# Altium PCB MAGI'sBuckPower-TEST.PcbDoc
Units mil, origin at the board's own origin, x right, y up, seen from the top; angles counter-clockwise.
Board outline 11520 x 6780 mil, 2 copper layers (Top Layer, Bottom Layer); 28 components, 16 nets, 102 pads, 88 vias.
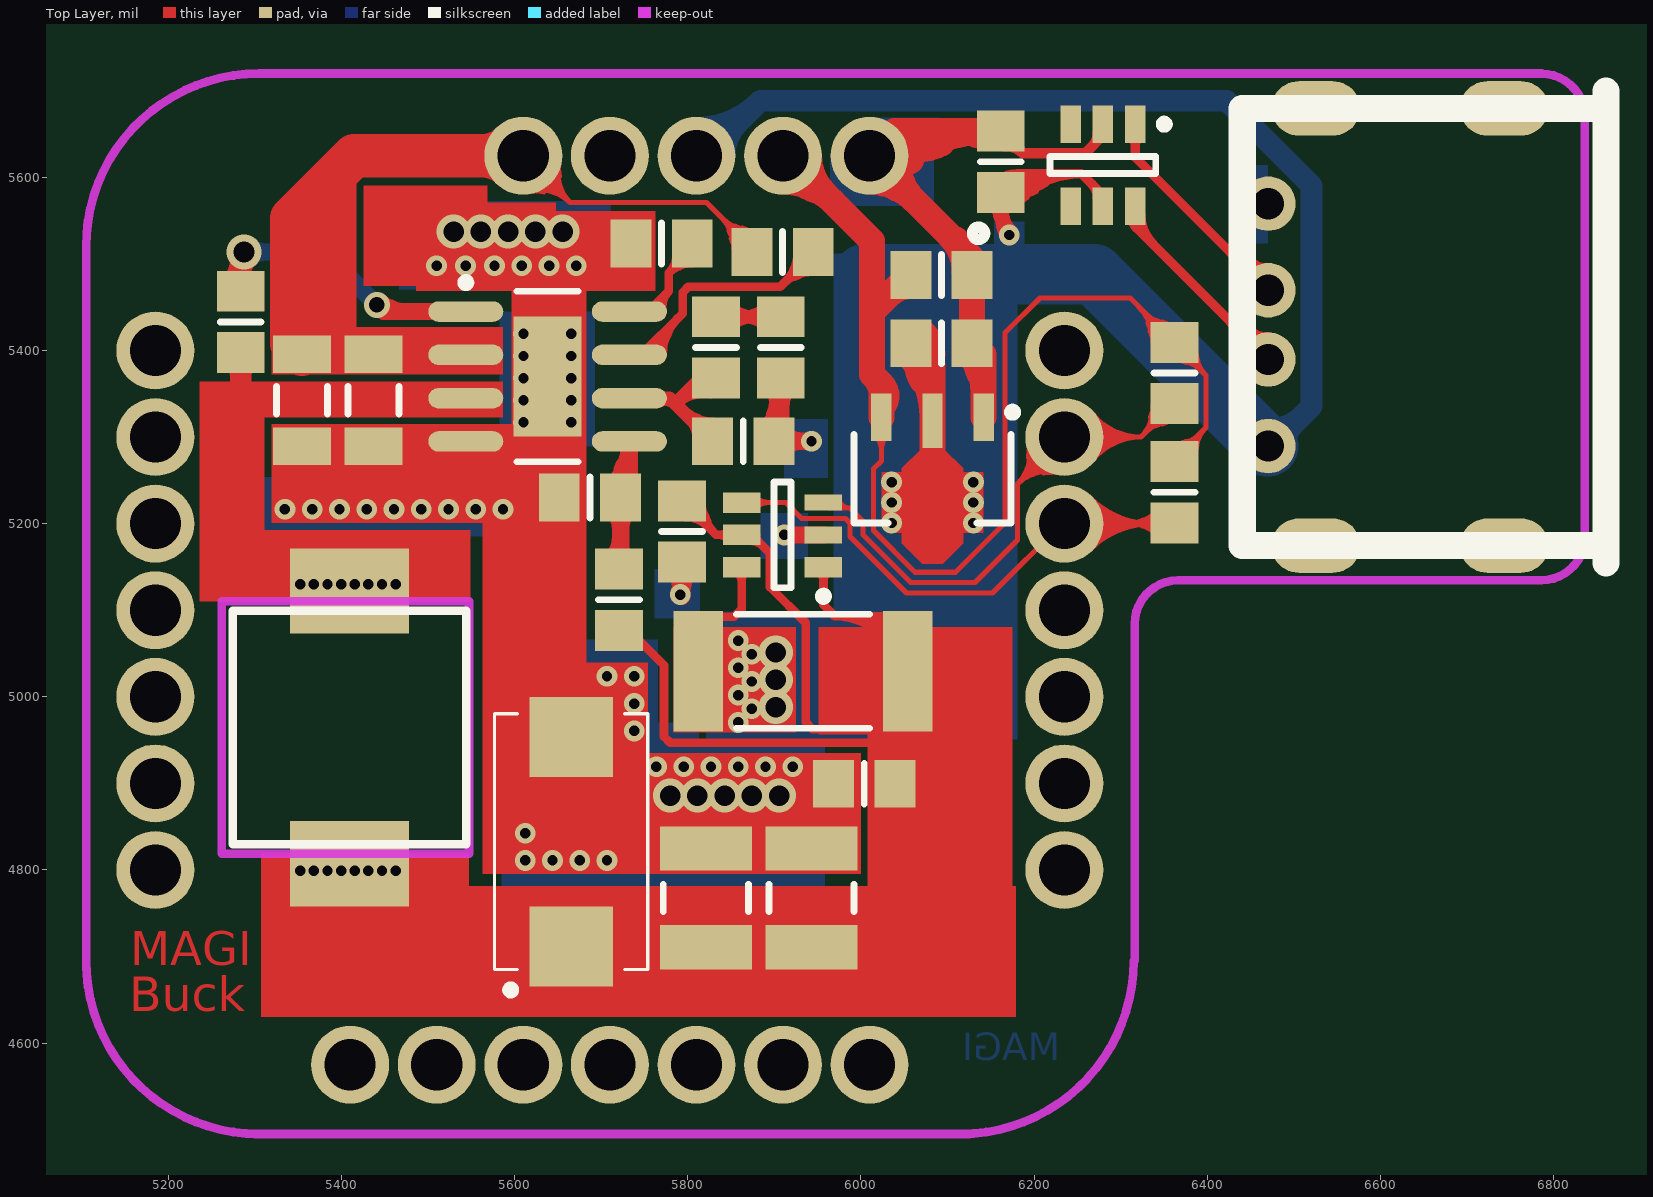
[diagram p0: Top Layer view]
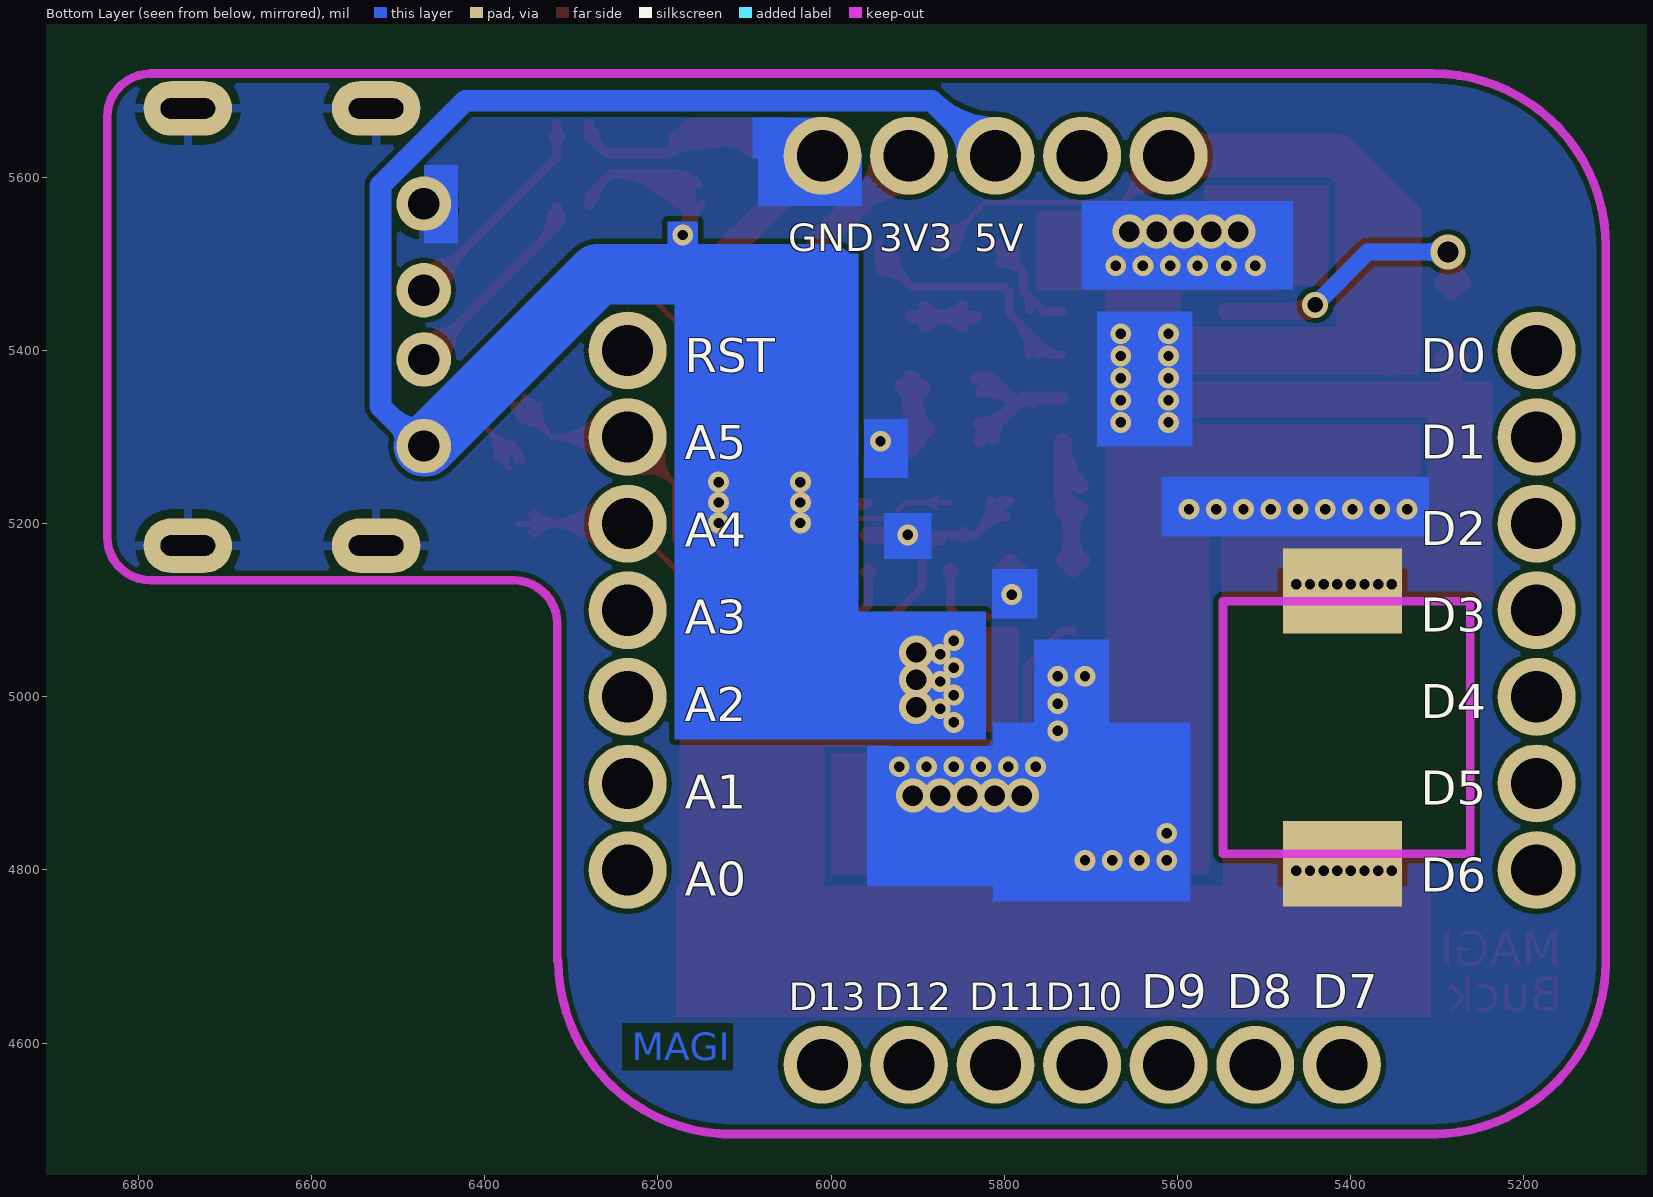
[diagram p1: Bottom Layer view, seen from below]

## Layer stack, top to bottom
Top Solder: solder mask 0.4, Solder Resist, Dk 3.5
Top Layer: signal copper 1.4
Dielectric1: dielectric 12.6, FR-4, Dk 4.8
Bottom Layer: signal copper 1.4
Bottom Solder: solder mask 0.4, Solder Resist, Dk 3.5

## Board outline
455,7180 460,7185 11965,7185 11965,415 11975,405 485,405

## Design rules (kind name [scope] priority, off if disabled: settings)
Clearance [All] p1: gap=6
ComponentClearance [InNet('No Net') vs InNet('No Net')] p1: gap=10 collisioncheckmode=3 verticalgap=0 showdistances=FALSE
HoleSize [All] p1: absolutevalues=TRUE maxlimit=118.11 minlimit=1.18 maxpercent=80.000 minpercent=20.000
PolygonConnect [All] p1: connectstyle=Relief reliefconductorwidth=10 reliefentries=4 polygonreliefangle="90 Angle" airgapwidth=10
RoutingVias [All] p1: holewidth=27.56 width=15.75 viastyle="Through Hole" minholewidth=12 minwidth=24 maxholewidth=100 maxwidth=150
SolderMaskExpansion [All] p1: expansion=4
Width [All] p1: maxlimit=1000 minlimit=6 preferedwidth=10
27 further rules are at their usual default settings.

## Classes and differential pairs
component class MAGI'sBuckPower-TEST: C11 C28 C29 C30 C31 C32 C33 C34 C35 C36 C37 C39 J2 J3 L2 R22 R23 R24 R25 R26 R27 R28 U3 U4 U7 U8

## Components (designator, comment, footprint, x,y, rotation, side; value= is the part's Value field where it differs from the comment)
C1 "10uf" C1210_N 5820.87,4767.72 r90 top
C2 "10uf" C1210_N 5942.91,4767.72 r90 top
C11 "10uf" 6-0805_N 6093.09,5408.41 r0 top
C28 "10nf" 6-0805_N 5283.46,5433.07 r90 top
C29 "0.1uf" 6-0805_N 5769.69,5523.62 r0 top
C30 "3.9nf" 6-0805_N 5832.68,5403.54 r90 top
C31 "CAP_1" C1206 5354.33,5342.52 r270 top
C32 "3.9nf" 6-0805_N 5864.17,5295.28 r0 top
C33 "10uf" 6-0805_N 6161.42,5618.11 r90 top
C34 "CAP_1" 6TPE330M 5665.35,4832.68 r90 top
C35 "0805" 6-0805_N 6003.94,4899.61 r180 top
C36 "10uf" 6-0805_N 6093.09,5487.15 r0 top
C37 "0805" 6-0805_N 5793.31,5190.94 r270 top
C39 "CAP_1" C1206 5437.01,5342.52 r270 top
J2 "USB1" USB-04A 6498.03,5427.17 r90 top
J3 "MAGI-M8" MAGIsBoard 5710,5100 r0 top
L2 "Inductor" 7*7 5419.29,4964.57 r270 top
R1 "5K" 6-0805_N 6362.2,5374.02 r90 top
R2 "5K" 6-0805_N 6362.2,5236.22 r90 top
R22 "RES1_1" 2512 5933.07,5029.53 r180 top
R25 "6.8K" 6-0805_N 5907.48,5403.54 r270 top
R26 "5K" 6-0805_N 5720.47,5112.2 r270 top
R27 "5K" 6-0805_N 5687.01,5230.31 r180 top
R28 "5K" 6-0805_N 5909.45,5513.78 r180 top
U3 "TPS2513" TPS2513 6279.53,5614.17 r270 top
U4 "MCP3421" tps2513 5909.45,5187.01 r180 top
U7 "HS7333" HS7333 6082.68,5251.97 r270 top
U8 "MP2307DN" MP2307DN 5638.03,5370 r0 top

## Footprints (in the part's own frame and the unit in brackets; to place one, negate y for a bottom-side part, rotate by r counter-clockwise, add the part's x,y. Pads: shape width x height; smd on the part's side, far side on the other; paste and mask are expansions set on the pad)
6-0805_N [mm] "Chip Resistor, Body 2.0x1.2mm, IPC Medium Density"
  rect 1.2x1.4 smd: 1(-0.9,0) 2(0.9,0)
  silkscreen extent 0,-0.6 0,0.6, body extent -1.07,-0.7 1.07,0.7, height 0.7
6TPE330M [mm] "Molded Capacitor, 2-Leads, Body 7.30x4.30mm, IPC Medium Density"
  rect 2.35x2.45 smd: 1(-3.075,0) 2(3.075,0)
  silkscreen extent -4.47,-2.25 3.75,2.25, body extent -3.75,-2.25 3.75,2.25, height 2
7*7 [mil]
  rect 98.43x137.8 all layers, no hole: 1(-157.5,-10) 2(157.5,-10)
  silkscreen extent -135,-145 135,125
2512 [mm]
  rect 1.45x3.55 smd: 1(-3.075,0) 2(3.075,0)
  silkscreen extent -1.95,-1.68 1.95,1.68, body extent -3.22,-1.7 3.22,1.7, height 0.65
C1206 [mm] "Chip Capacitor, Body 3.2x1.6mm, IPC High Density"
  rect 1.1x1.7 smd: 1(-1.35,0) 2(1.35,0)
  silkscreen extent -0.4,-0.75 0.4,0.75, body extent -1.7,-0.9 1.7,0.9, height 1.3
C1210_N [mm] "Chip Capacitor, Body 3.2x2.5mm, IPC Medium Density"
  rect 1.3x2.7 smd: 1(-1.45,0) 2(1.45,0)
  silkscreen extent -0.4,-1.25 0.4,1.25, body extent -1.7,-1.35 1.7,1.35, height 1.5
HS7333 [mm] "SOT89, 3-Leads, Body 4.50x2.50mm, Pitch 1.50mm, Lead Span 4.1mm, IPC Medium Density"
  rect 1.4x0.6 smd: 1(-1.8,1.5) 3(-1.8,-1.5)
  rect 1.6x0.6 smd: 2(-1.7,0)
  Top Layer region: -0.9,0.3 -0.3,0.9 1.9,0.9 2.5,0.3 2.5,-0.3 1.9,-0.9 -0.3,-0.9 -0.9,-0.3
  silkscreen extent -2.07,-2.3 1.3,2.48, body extent -1.3,-2.3 1.3,2.3, height 1.6
MAGIsBoard [mil]
  round 90 hole 59.06: 1(300,525) 2(200,525) 3(100,525) 4(0,525) 5(-100,525) 8(-525,300) 9(-525,200) 10(-525,100) 11(-525,0) 12(-525,-100) 13(-525,-200) 14(-525,-300) 15(-300,-525) 16(-200,-525) 17(-100,-525) 18(0,-525) 19(100,-525) 20(200,-525) 21(300,-525) 22(525,-300) 23(525,-200) 24(525,-100) 25(525,0) 26(525,100) 27(525,200) 28(525,300)
  Keep-Out Layer lines w10: -605,-415 -605,290 -605,420 cw(c-405,420) -405,620 ; -605,-405 ccw(c-405,-405) -405,-605 ; -410,-605 415,-605 ; 405,-605 ccw(c405,-405) 605,-405
  silkscreen extent 419,428 433,442
MP2307DN [mm] "SOIC, 8-Leads, Body 4.90x3.90mm, Pitch 1.27mm, Thermal Pad 3.51.2x2.00.2mm, IPC Medium Density"
  oval 2.2x0.6 smd: 1(-2.4,1.905) 2(-2.4,0.635) 3(-2.4,-0.635) 4(-2.4,-1.905) 5(2.4,-1.905) 6(2.4,-0.635) 7(2.4,0.635) 8(2.4,1.905)
  rect 2x3.51 smd: 9(0,0)
  silkscreen extent -2.52,-2.5 0.9,2.88, body extent -2,-2.5 2,2.5, height 1.7
TPS2513 [mm]
  rect 1.1x0.6 smd: 1(-1.2,0.95) 2(-1.2,0) 3(-1.2,-0.95) 4(1.2,-0.95) 5(1.2,0) 6(1.2,0.95)
  silkscreen extent -1.32,-1.55 0.25,1.93, body extent -0.87,-1.52 0.87,1.53, height 1.45
tps2513 [mm]
  rect 1.1x0.6 smd: 1(-1.2,0.95) 4(1.2,-0.95) 5(1.2,0) 6(1.2,0.95)
  rect 1.1x0.508 smd: 2(-1.2,0)
  rect 1.1x0.457 smd: 3(-1.2,-0.95)
  silkscreen extent -1.33,-1.55 0.25,1.92, body extent -0.87,-1.52 0.87,1.53, height 1.45
USB-04A [mm]
  oval 1.6x2.6 hole 0.6 slot 1.6 at 90 deg: 0(-6.413,-0.699) 0(-6.413,-6.223) 0(6.413,-0.698) 0(6.414,-6.223)
  round 1.6 hole 0.92: 1(-3.492,0.698) 2(-0.953,0.698) 3(1.079,0.699) 4(3.619,0.699)
  silkscreen extent -6.92,-9.21 6.92,1.46

## Part data
C1 C2 C11 C33 C36: library part "CAPACITOR POL", "Capacitor"
C28 C29 C30 C32 C35 C37: library part CAP_1, "Capacitor"
C31 C34 C39: "Capacitor"
R1 R2 R25 R26 R27 R28: library part RES1

## Via types
v1: diameter 24, hole 12, Top Layer to Bottom Layer, 73 vias
v2: diameter 39.37, hole 23.62, Top Layer to Bottom Layer, 13 vias
v3: diameter 30, hole 18, Top Layer to Bottom Layer, 1 vias
v4: diameter 40, hole 24, Top Layer to Bottom Layer, 1 vias

## Nets (pads, with @x,y where several pads share a name; then routed paths per layer and width w, separated by ;. In a path a pad name is that pad's centre, name@x,y a point inside that pad or via, vN(x,y) a via of type N, cw(c..) or ccw(c..) an arc to the next point about the centre after c; other vN are vias at no path point)
3.3V: C36.1 J3.2 R1.2 R2.2 U7.3 | length 3159
  Top Layer w6: U7.3 6023.62,5272.57 6014.43,5263.38 6014.43,5192.09 6062.63,5143.89 6109.37,5143.89 6166.51,5201.02 6166.51,5420.45 6206.69,5460.63 6311.02,5460.63 R1.2 6362.2,5407.76 6398.76,5371.2 ; 6331.58,5432.09 ccw(c6367.01,5441.58) R1.2@6357.38,5406.19 ; 6334.28,5422.01 ccw(c6363.84,5429.93) R1.2@6355.81,5400.4 ; 6339.51,5435.1 cw(c6331.69,5405.95) R1.2@6361.62,5409.89 ; R1.2@6348.18,5432.77 cw(c6341.33,5407.22) R1.2@6367.57,5410.67 ; R2.2@6356.79,5272.32 cw(c6381.76,5270.54) R2.2@6375.28,5294.72 ; R1.2@6356.81,5408.53 ccw(c6382.34,5411.05) R1.2@6375.7,5386.27 ; R2.2 6362.2,5274.67 6398.76,5311.23 ; R2.2@6362.77,5271.89 cw(c6390.65,5269.91) 6383.42,5296.9 ; R1.2@6362.78,5409.12 ccw(c6391.56,5411.95) 6384.07,5384.02 ; R1.2@6371.82,5416.91 cw(c6344.34,5380.82) R1.2@6389.29,5386.9 ; R2.2@6371.94,5264.28 ccw(c6343.91,5299.95) R2.2@6388.95,5294.55 ; 6023.62,5285.81 cw(c6044.89,5285.81) 6029.85,5300.86 ccw(c6044.89,5285.81) 6023.62,5285.81 ; 6023.62,5285.81 ccw(c6002.35,5285.81) 6017.39,5300.86 cw(c6002.35,5285.81) 6023.62,5285.81 ; 6398.76,5311.23 ccw(c6429.29,5280.71) 6386.55,5274.58 cw(c6429.29,5280.71) 6398.76,5311.23 ; 6398.76,5311.23 6398.76,5371.2 ; 6398.76,5371.21 cw(c6428.97,5401.41) 6386.6,5406.83 ccw(c6428.97,5401.41) 6398.76,5371.21 ; 6320.28,5451.37 cw(c6278.35,5409.45) 6337.65,5409.45 ccw(c6278.35,5409.45) 6320.28,5451.37 ; 6329.78,5441.87 ccw(c6358.27,5470.35) 6358.27,5430.07 cw(c6358.27,5470.35) 6329.78,5441.87 ; 6330.52,5441.13 cw(c6298.84,5409.45) 6343.65,5409.45 ccw(c6298.84,5409.45) 6330.52,5441.13 ; R1.2@6340.03,5431.63 ccw(c6358.27,5449.87) 6358.27,5424.07 cw(c6358.27,5449.87) R1.2@6340.03,5431.63 ; R1.2@6340.77,5430.89 cw(c6319.33,5409.45) 6349.65,5409.45 ccw(c6319.33,5409.45) R1.2@6340.77,5430.89 ; R2.2@6366.14,5286.28 ccw(c6366.14,5304.78) 6379.23,5291.7 cw(c6366.14,5304.78) R2.2@6366.14,5286.28 ; R2.2@6366.14,5292.28 ccw(c6366.14,5325.27) 6389.47,5301.94 cw(c6366.14,5325.27) R2.2@6366.14,5292.28 ; R1.2@6366.14,5388.83 cw(c6366.14,5352.61) 6391.75,5378.22 ccw(c6366.14,5352.61) R1.2@6366.14,5388.83 ; R1.2@6366.14,5394.83 cw(c6366.14,5373.1) 6381.51,5388.46 ccw(c6366.14,5373.1) R1.2@6366.14,5394.83 ; R2.2@6374.68,5272.88 cw(c6399.62,5276.45) 6381.8,5294.27 ccw(c6399.62,5276.45) R2.2@6374.68,5272.88 ; R1.2@6374.69,5408.35 ccw(c6398.32,5405.33) 6381.48,5388.49 cw(c6398.32,5405.33) R1.2@6374.69,5408.35 ; R2.2@6380.62,5273.73 cw(c6414.45,5278.58) 6390.28,5302.75 ccw(c6414.45,5278.58) R2.2@6380.62,5273.73 ; R1.2@6380.65,5407.59 ccw(c6413.64,5403.37) 6390.12,5379.85 cw(c6413.64,5403.37) R1.2@6380.65,5407.59
  Top Layer w30: 5949.41,5589.9 ccw(c5902.99,5577.46) J3.2 ; 5950.49,5584.15 cw(c5965.26,5639.28) J3.2 ; U7.3 6023.62,5361.57 ; C36.1 6055.52,5487.15 6013.04,5444.67 ; J3.2 5914.54,5625 6013.04,5526.51 6013.04,5444.67 ; 6013.04,5372.15 cw(c5979.78,5338.9) 6026.81,5338.56 ccw(c5979.78,5338.9) 6013.04,5372.15 ; 6013.04,5372.16 6023.62,5361.57 ; 6013.04,5372.16 6013.04,5444.67 ; 6023.62,5361.57 cw(c6009.6,5347.55) 6026.31,5336.87 ccw(c6009.6,5347.55) 6023.62,5361.57 ; J3.2@5910,5595 cw(c5910,5511.61) 5968.96,5570.58 ccw(c5910,5511.61) J3.2@5910,5595 ; J3.2@5940,5625 ccw(c6001.46,5625) 5958,5581.54 cw(c6001.46,5625) J3.2@5940,5625 ; 6032.57,5464.2 cw(c6057.66,5439.11) 6057.66,5474.59 ccw(c6057.66,5439.11) 6032.57,5464.2
5SW: C28.1 L2.1 U8.3 | length 100.1
  Top Layer w25: C28.1@5275.6,5389.77 cw(c5256.61,5370.79) 5283.46,5370.79 cw(c5310.32,5370.79) C28.1@5291.33,5389.77 ; C28.1 5283.46,5342.52 5285.43,5340.55
  other v1: 5352.36,5129.92 5368.11,5129.92 5383.86,5129.92 5399.61,5129.92 5415.35,5129.92 5431.1,5129.92 5446.85,5129.92 5462.6,5129.92
5V: C11.1 C33.1 J2.1 J3.3 R22.2 U3.5 U4.6 U7.2 | length 4011.2
  Top Layer w10: R22.2@5818.9,5092.52 5853.35,5092.52 5862.2,5101.38 U4.6 ; 5862.2,5133.16 cw(c5878.65,5133.16) 5867.02,5144.79 ccw(c5878.65,5133.16) 5862.2,5133.16 ; 5862.2,5133.16 ccw(c5845.76,5133.16) 5857.39,5144.79 cw(c5845.76,5133.16) 5862.2,5133.16
  Top Layer w11: C11.1 C11.1@6057.66,5412.97 ; 6160.07,5553.53 cw(c6146.63,5540.09) v1@6164.98,5535.15 ; 6160.82,5547.28 cw(c6155.53,5538.7) v1@6165.09,5535.52 ; C33.1@6162.73,5579.82 ccw(c6177.28,5595.64) 6189.52,5577.97 ; 6164.91,5557.02 cw(c6146.17,5546.2) v1@6165.46,5536.41 ; C33.1@6170.18,5587.92 ccw(c6186.83,5606.02) 6200.83,5585.8 ; v1@6173.23,5531.5 v1(6171.26,5533.46) 6161.42,5543.31 ; C33.1@6174.68,5598.22 ccw(c6188.21,5620.75) 6202.57,5598.74 ; C33.1@6177.62,5596.01 ccw(c6196.37,5616.39) 6212.13,5593.63 ; C33.1@6183.09,5578.95 cw(c6202.92,5574.77) 6191.85,5591.74 ; U3.5 6279.53,5579.26 6254.45,5604.33 ; C33.1@6156.13,5563.05 ccw(c6194.24,5573.26) v1@6174.51,5539.09 ; C33.1@6156.13,5563.05 ccw(c6194.24,5573.26) v1@6174.51,5539.09 ; C33.1@6156.13,5563.05 ccw(c6194.24,5573.26) v1@6174.51,5539.09 ; 6158.3,5554.95 ccw(c6179.38,5560.6) v1@6173.12,5539.69 ; 6158.3,5554.95 ccw(c6179.38,5560.6) v1@6173.12,5539.69 ; 6158.3,5554.95 ccw(c6179.38,5560.6) v1@6173.12,5539.69 ; 6161.42,5543.31 cw(c6153.18,5535.07) 6164.79,5534.04 ccw(c6153.18,5535.07) 6161.42,5543.31 ; 6161.42,5543.31 ccw(c6169.66,5551.55) 6170.69,5539.94 cw(c6169.66,5551.55) 6161.42,5543.31 ; 6161.42,5543.31 cw(c6195.12,5543.31) 6173.2,5568.91 ccw(c6195.12,5543.31) 6161.42,5543.31 ; 6161.42,5543.31 ccw(c6127.72,5543.31) 6149.63,5568.91 cw(c6127.72,5543.31) 6161.42,5543.31 ; 6161.42,5543.31 C33.1 6183.07,5604.33 6254.45,5604.33 ; 6254.45,5604.33 ccw(c6254.45,5502.78) 6178.85,5570.58 cw(c6254.45,5502.78) 6254.45,5604.33 ; C33.1@6154.28,5592.61 cw(c6180.53,5569.07) 6180.53,5604.33 ccw(c6180.53,5569.07) C33.1@6154.28,5592.61 ; 6161.42,5546.36 ccw(c6184.16,5546.36) 6168.08,5530.28 cw(c6184.16,5546.36) 6161.42,5546.36 ; C33.1@6161.42,5572.92 ccw(c6210.71,5572.92) 6175.86,5538.06 cw(c6210.71,5572.92) C33.1@6161.42,5572.92 ; C33.1@6162.47,5585.27 cw(c6205.17,5546.97) 6205.17,5604.33 ccw(c6205.17,5546.97) C33.1@6162.47,5585.27 ; C33.1@6170.66,5577.92 cw(c6229.81,5524.88) 6229.81,5604.33 ccw(c6229.81,5524.88) C33.1@6170.66,5577.92 ; 6267,5591.79 cw(c6251.98,5576.77) 6273.22,5576.77 ccw(c6251.98,5576.77) 6267,5591.79
  Top Layer w30: C11.1 6082.68,5383.39 6082.68,5251.97 ; C11.1@6065.99,5402.24 ccw(c6113.56,5389.5) 6070.91,5364.87 ; C11.1@6051.56,5398.38 cw(c5976.44,5323.26) 6082.68,5323.26 ccw(c5976.44,5323.26) C11.1@6051.56,5398.38 ; C11.1@6057.66,5395.85 cw(c6057.66,5365.53) 6079.1,5386.97 ccw(c6057.66,5365.53) C11.1@6057.66,5395.85 ; C11.1@6072.77,5419.59 cw(c6048.87,5395.68) 6082.68,5395.68 ccw(c6048.87,5395.68) C11.1@6072.77,5419.59
  Bottom Layer w25: J3.3 5820.2,5625 5883.7,5688.5 6422.4,5688.5 6520.53,5590.37 6520.53,5335.49 J2.1@6470.47,5285.43 ; 6082.68,5472.44 6082.68,5488.19 ; J3.3@5810,5657.5 ccw(c5810,5760.58) 5882.89,5687.69 cw(c5810,5760.58) J3.3@5810,5657.5 ; J3.3@5842.5,5625 cw(c5896.34,5625) 5858.27,5663.07 ccw(c5896.34,5625) J3.3@5842.5,5625 ; J2.1@6470.53,5308.66 ccw(c6470.53,5364.6) 6510.08,5325.04 cw(c6470.53,5364.6) J2.1@6470.53,5308.66 ; J2.1@6489.53,5289.67 cw(c6525.31,5289.67) 6500.01,5314.97 ccw(c6525.31,5289.67) J2.1@6489.53,5289.67
  Bottom Layer w70: 6003.94,5488.19 6082.68,5488.19 6269.48,5488.19 6468.01,5289.67 J2.1
  other v1: 5858.27,4970.47 5874.02,4986.22 5858.27,5001.97 5874.02,5017.72 5858.27,5033.46 5874.02,5049.21 5858.27,5064.96 6035.43,5200.79 6129.92,5200.79 6035.43,5224.41 6129.92,5224.41 6035.43,5248.03 6129.92,5248.03
  other v2: 5901.57,4988.19 5901.57,5019.69 5901.57,5051.18
DM1: J2.2 U3.6 | length 820.1
  Top Layer w11: U3.6@6313.77,5551.62 cw(c6295.75,5520.4) 6330.57,5529.73 ; U3.6 6316.93,5543.27 ; 6438.69,5411.47 ccw(c6477.1,5421.76) J2.2@6469.13,5382.8 ; 6448.73,5421.5 cw(c6438.44,5383.09) J2.2@6477.39,5391.07 ; J2.2 6316.93,5543.27 ; 6316.93,5543.27 cw(c6328.9,5543.27) 6321.06,5552.32 ccw(c6328.9,5543.27) 6316.93,5543.27 ; 6316.93,5543.27 ccw(c6304.96,5543.27) 6312.8,5552.32 cw(c6304.96,5543.27) 6316.93,5543.27 ; 6426.15,5434.04 cw(c6381.78,5389.67) 6444.54,5389.67 ccw(c6381.78,5389.67) 6426.15,5434.04 ; 6426.15,5434.04 ccw(c6470.53,5478.42) 6470.53,5415.66 cw(c6470.53,5478.42) 6426.15,5434.04 ; 6444.93,5415.27 cw(c6419.33,5389.67) 6455.54,5389.67 ccw(c6419.33,5389.67) 6444.93,5415.27 ; 6444.93,5415.27 ccw(c6470.53,5440.86) 6470.53,5404.66 cw(c6470.53,5440.86) 6444.93,5415.27 ; U3.6@6312.24,5557.09 ccw(c6334.28,5557.09) 6318.7,5541.5 cw(c6334.28,5557.09) U3.6@6312.24,5557.09 ; U3.6@6323.24,5557.09 ccw(c6371.84,5557.09) 6337.47,5522.72 cw(c6371.84,5557.09) U3.6@6323.24,5557.09
DP1: J2.3 U3.1 | length 702.2
  Top Layer w11: U3.1 6316.93,5623.27 J2.3 ; 6438.69,5491.47 ccw(c6477.1,5501.76) J2.3@6469.13,5462.8 ; 6448.73,5501.5 cw(c6438.44,5463.09) J2.3@6477.39,5471.07 ; 6316.93,5636.34 cw(c6332.17,5636.34) 6321.39,5647.11 ccw(c6332.17,5636.34) 6316.93,5636.34 ; 6316.93,5636.34 ccw(c6301.69,5636.34) 6312.47,5647.11 cw(c6301.69,5636.34) 6316.93,5636.34 ; 6426.15,5514.04 cw(c6381.78,5469.67) 6444.54,5469.67 ccw(c6381.78,5469.67) 6426.15,5514.04 ; 6426.15,5514.04 ccw(c6470.53,5558.42) 6470.53,5495.66 cw(c6470.53,5558.42) 6426.15,5514.04 ; 6444.93,5495.27 cw(c6419.33,5469.67) 6455.54,5469.67 ccw(c6419.33,5469.67) 6444.93,5495.27 ; 6444.93,5495.27 ccw(c6470.53,5520.86) 6470.53,5484.66 cw(c6470.53,5520.86) 6444.93,5495.27
GND: C1.2 C2.2 C11.2 C29.1 C31.2 C32.2 C33.2 C34.2 C35.2 C36.2 C37.2 C39.2 J2.0 J2.4 J3.1 R25.2 R27.2 U3.2 U4.2 U7.1 U8.4 U8.9 | length 2753.2
  Top Layer w12: C33.2 6187.2,5627.76 ; U3.2 6279.53,5648.38 6258.91,5627.76 6187.2,5627.76 ; 6187.2,5627.76 cw(c6201.6,5642.16) 6182.17,5648.26 ccw(c6201.6,5642.16) 6187.2,5627.76 ; 6187.2,5627.77 ccw(c6167.39,5607.96) 6166.14,5635.94 cw(c6167.39,5607.96) 6187.2,5627.77 ; 6267.35,5636.21 ccw(c6251.98,5651.57) 6273.72,5651.57 cw(c6251.98,5651.57) 6267.35,5636.21
  Top Layer w20: v1(5791.34,5118.11) 5793.31,5116.14 C37.2 ; R25.2@5895.42,5357.18 cw(c5882.92,5340.37) 5903.15,5334.95 ; 5901.64,5329.06 ccw(c5913.12,5322.44) C32.2@5906.46,5310.99 ; R25.2 5907.48,5303.15 C32.2 v1(5942.91,5295.28) ; v1(5911.42,5187.01) U4.2 ; v1@5789.61,5119.11 ccw(c5776.35,5126.77) 5791.14,5130.73 ; v1@5789.61,5119.11 ccw(c5776.35,5126.77) 5791.14,5130.73 ; v1@5789.61,5119.11 ccw(c5776.35,5126.77) 5791.14,5130.73 ; v1@5793.31,5122.63 cw(c5826.19,5122.63) 5802.94,5145.88 ccw(c5826.19,5122.63) v1@5793.31,5122.63 ; v1@5793.31,5122.63 ccw(c5760.42,5122.63) 5783.67,5145.88 cw(c5760.42,5122.63) v1@5793.31,5122.63 ; 5907.48,5335.22 cw(c5940.37,5335.22) 5917.11,5358.48 ccw(c5940.37,5335.22) 5907.48,5335.22 ; 5907.48,5335.22 ccw(c5874.59,5335.22) 5897.85,5358.48 cw(c5874.59,5335.22) 5907.48,5335.22 ; v1@5932.49,5295.28 cw(c5932.49,5328.16) 5909.24,5304.91 ccw(c5932.49,5328.16) v1@5932.49,5295.28 ; v1@5932.49,5295.28 ccw(c5932.49,5262.39) 5909.24,5285.64 cw(c5932.49,5262.39) v1@5932.49,5295.28 ; C32.2@5889.97,5308.84 ccw(c5847.71,5351.11) 5907.48,5351.11 cw(c5847.71,5351.11) C32.2@5889.97,5308.84
  Top Layer w30: J3.1@6025.67,5650.58 ccw(c6039.98,5673.96) 6053.69,5650.22 ccw(c6067.39,5626.48) J3.1@6039.99,5625.78 ; J3.1@6030.65,5646.76 ccw(c6066.7,5684.73) 6092.88,5639.39 ; 6047.8,5584.87 cw(c6061.37,5635.52) J3.1 ; 6050.13,5587.2 ccw(c5999.48,5573.63) J3.1 ; 6058.09,5619.3 cw(c6037.86,5654.35) J3.1 ; 6109.89,5528.46 ccw(c6157.46,5541.21) C36.2@6132.83,5498.56 ; C11.2@6136.24,5400.63 ccw(c6162.37,5387.6) 6137.08,5373 ; U7.1 6141.73,5395.2 C11.2 C36.2 6128.52,5506.48 J3.1 ; C33.2 6038.54,5653.54 J3.1 ; J3.1 cw(c6078.91,5556.09) 6078.91,5653.54 ccw(c6078.91,5556.09) J3.1 ; 6061.21,5573.79 cw(c6112.43,5625) 6040,5625 ccw(c6112.43,5625) 6061.21,5573.79 ; 6061.21,5573.79 ccw(c6010,5522.57) 6010,5595 cw(c6010,5522.57) 6061.21,5573.79 ; 6133.25,5648.7 cw(c6140.05,5623.35) C33.2@6153.17,5646.08 ; 6133.25,5648.7 cw(c6140.05,5623.35) C33.2@6153.17,5646.08 ; 6133.25,5648.7 cw(c6140.05,5623.35) C33.2@6153.17,5646.08 ; J3.1@6031.21,5603.79 cw(c6151.34,5483.66) 6151.34,5653.54 ccw(c6151.34,5483.66) J3.1@6031.21,5603.79 ; 6102.92,5532.08 cw(c6061.94,5491.09) 6119.9,5491.09 ccw(c6061.94,5491.09) 6102.92,5532.08 ; C11.2@6122.43,5398.38 cw(c6075.82,5351.77) 6141.73,5351.77 ccw(c6075.82,5351.77) C11.2@6122.43,5398.38
  other v1: 5612.2,4811.02 5643.7,4811.02 5675.2,4811.02 5706.69,4811.02 5612.2,4842.52 5763.78,4919.29 5795.28,4919.29 5826.77,4919.29 5858.27,4919.29 5889.76,4919.29 5921.26,4919.29 5738.19,4960.63 5738.19,4992.13 5706.69,5023.62 5738.19,5023.62 5334.65,5216.54 5366.14,5216.54 5397.64,5216.54 5429.13,5216.54 5460.63,5216.54 5492.13,5216.54 5523.62,5216.54 5555.12,5216.54 5586.61,5216.54 5610.24,5316.93 5665.35,5316.93 5610.24,5342.52 5665.35,5342.52 5610.24,5368.11 5665.35,5368.11 5610.24,5393.7 5665.35,5393.7 5610.24,5419.29 5665.35,5419.29 5509.84,5498.03 5543.31,5498.03 5576.77,5498.03 5608.27,5498.03 5639.76,5498.03 5671.26,5498.03
  other v2: 5779.53,4885.83 5811.02,4885.83 5842.52,4885.83 5874.02,4885.83 5905.51,4885.83 5529.53,5537.4 5561.02,5537.4 5592.52,5537.4 5624.02,5537.4 5655.51,5537.4
NetC28_2: C28.2 U8.1 | length 847.4
  Top Layer w20: C28.2@5270.17,5478.4 ccw(c5246.47,5503.45) v4@5280.95,5503.45 ; C28.2@5275.49,5483.09 cw(c5310.55,5473.69) v4@5292.4,5505.12 ; v4@5280.95,5497.96 ccw(c5308.98,5497.96) C28.2@5289.16,5478.14 ; C28.2 5283.46,5509.84 5285.43,5507.87 5289.37,5507.87 5287.4,5509.84 v4(5287.4,5513.78) ; v3(5440.94,5452.76) 5448.7,5445 U8.1 ; v3@5443.14,5448.26 cw(c5450.72,5432.77) 5459.35,5447.71 ; v4@5278.74,5508.78 cw(c5259.6,5497.73) C28.2@5280.95,5492.01 ; v4@5278.74,5508.78 cw(c5259.6,5497.73) C28.2@5280.95,5492.01 ; v4@5278.74,5508.78 cw(c5259.6,5497.73) C28.2@5280.95,5492.01 ; C28.2@5280.2,5489.22 cw(c5305.49,5482.45) v4@5292.4,5505.12 ; C28.2@5280.2,5489.22 cw(c5305.49,5482.45) v4@5292.4,5505.12 ; C28.2@5280.2,5489.22 cw(c5305.49,5482.45) v4@5292.4,5505.12 ; v4@5283.46,5501.39 cw(c5250.58,5501.39) 5273.83,5478.14 ccw(c5250.58,5501.39) v4@5283.46,5501.39 ; v4@5283.46,5501.39 ccw(c5316.35,5501.39) 5293.1,5478.14 cw(c5316.35,5501.39) v4@5283.46,5501.39 ; C28.2@5283.46,5480.13 cw(c5321.05,5480.13) 5294.47,5506.71 ccw(c5321.05,5480.13) C28.2@5283.46,5480.13 ; v3@5444.48,5456.29 ccw(c5471.74,5483.55) 5471.74,5445 cw(c5471.74,5483.55) v3@5444.48,5456.29
  Bottom Layer w20: v4(5287.4,5513.78) 5379.92,5513.78 v3(5440.94,5452.76) ; 5311.54,5513.78 cw(c5311.54,5537.92) 5294.47,5520.85 ccw(c5311.54,5537.92) 5311.54,5513.78 ; 5311.54,5513.78 ccw(c5311.54,5489.64) 5294.47,5506.71 cw(c5311.54,5489.64) 5311.54,5513.78
NetC29_2: C29.2 U8.8 | length 322.2
  Top Layer w10: U8.8 5754.49,5445 5778.12,5468.62 ; 5785.5,5495.81 ccw(c5778.07,5523.52) C29.2@5806.48,5519.49 ; C29.2 5805.12,5516.6 5778.12,5489.6 ; 5778.12,5468.62 ccw(c5796.66,5450.08) 5770.75,5446.05 cw(c5796.66,5450.08) 5778.12,5468.62 ; 5778.12,5468.62 5778.12,5489.6 ; 5778.12,5489.6 ccw(c5756.24,5511.48) 5786.75,5516.6 cw(c5756.24,5511.48) 5778.12,5489.6 ; 5778.6,5490.08 cw(c5805.12,5463.56) 5805.12,5501.06 ccw(c5805.12,5463.56) 5778.6,5490.08
NetC30_1: C30.1 C32.1 U8.6 | length 512.4
  Top Layer w15: U8.6 5779.02,5345 5785.43,5338.58 ; 5804.17,5321.92 cw(c5795.51,5289.58) C32.1@5827.66,5298.9 ; C32.1 5785.43,5338.58 ; C30.1 5814.96,5368.11 5785.43,5338.58 ; 5785.43,5338.58 cw(c5819.43,5304.59) 5826.4,5352.16 ccw(c5819.43,5304.59) 5785.43,5338.58 ; 5785.43,5338.58 ccw(c5774.03,5327.18) 5766.13,5341.24 cw(c5774.03,5327.18) 5785.43,5338.58 ; 5794.5,5329.52 ccw(c5828.74,5363.76) 5828.74,5315.33 cw(c5828.74,5363.76) 5794.5,5329.52 ; 5804,5320.01 cw(c5783.2,5299.21) 5812.62,5299.21 ccw(c5783.2,5299.21) 5804,5320.01 ; C30.1@5806.55,5359.7 cw(c5824.83,5341.43) 5828.58,5367 ccw(c5824.83,5341.43) C30.1@5806.55,5359.7
NetC30_2: C30.2 R25.1 | length 319.4
  Top Layer w15: C30.2 R25.1 ; 5864.62,5438.98 cw(c5864.62,5400.05) 5892.14,5427.58 ccw(c5864.62,5400.05) 5864.62,5438.98 ; 5864.62,5438.98 ccw(c5864.62,5477.9) 5892.14,5450.38 cw(c5864.62,5477.9) 5864.62,5438.98 ; 5875.54,5438.98 cw(c5875.54,5477.9) 5848.01,5450.38 ccw(c5875.54,5477.9) 5875.54,5438.98 ; 5875.54,5438.98 ccw(c5875.54,5400.05) 5848.01,5427.58 cw(c5875.54,5400.05) 5875.54,5438.98
NetR26_1: R26.1 R27.1 U8.5 | length 489.7
  Top Layer w20: R26.1 5722.44,5149.61 5722.44,5220.47 5732.52,5230.55 U8.5 ; 5726.43,5267.47 ccw(c5741.53,5258.75) R27.1@5730.81,5245 ; 5722.44,5193.49 cw(c5755.33,5193.49) 5732.07,5216.75 ccw(c5755.33,5193.49) 5722.44,5193.49 ; 5722.44,5193.49 ccw(c5689.55,5193.49) 5712.81,5216.75 cw(c5689.55,5193.49) 5722.44,5193.49 ; R26.1@5710.84,5157.27 ccw(c5682.83,5185.28) 5722.44,5185.28 cw(c5682.83,5185.28) R26.1@5710.84,5157.27 ; R27.1@5712.81,5243.88 ccw(c5665.22,5291.47) 5732.52,5291.47 cw(c5665.22,5291.47) R27.1@5712.81,5243.88 ; 5722.44,5175.77 ccw(c5748.61,5175.77) 5730.1,5157.27 cw(c5748.61,5175.77) 5722.44,5175.77
NetR28_1: R28.1 U8.7 | length 741.4
  Top Layer w10: U8.7 5746.28,5395 5794.12,5442.84 5794.12,5467.15 5800.56,5473.6 5906.67,5473.6 5944.88,5511.81 R28.1@5944.88,5523.62 ; U8.7@5760.61,5400.9 ccw(c5741.16,5434.59) 5778.74,5424.52 ; 5764.15,5407.41 ccw(c5769.41,5406) U8.7@5767.01,5401.12 ; 5920.84,5489.61 cw(c5949.49,5481.94) R28.1@5944.66,5511.2 ; 5922.5,5485.22 ccw(c5913.88,5517.36) R28.1@5946.22,5509.52 ; U8.7@5750.83,5395 cw(c5761.81,5395) 5754.05,5402.77 ccw(c5761.81,5395) U8.7@5750.83,5395 ; U8.7@5760.83,5395 cw(c5795.96,5395) 5771.12,5419.84 ccw(c5795.96,5395) U8.7@5760.83,5395 ; U8.7@5770.83,5395 cw(c5830.1,5395) 5788.19,5436.91 ccw(c5830.1,5395) U8.7@5770.83,5395 ; 5909.73,5476.66 cw(c5944.88,5441.51) 5944.88,5491.22 ccw(c5944.88,5441.51) 5909.73,5476.66 ; 5914.48,5481.41 ccw(c5886.05,5509.84) 5926.26,5509.84 cw(c5886.05,5509.84) 5914.48,5481.41 ; R28.1@5926.8,5493.73 cw(c5944.88,5475.65) 5944.88,5501.22 ccw(c5944.88,5475.65) R28.1@5926.8,5493.73
SCL: J3.27 R1.1 U4.3 | length 2485.3
  Top Layer w6: U4.3 5963.09,5218.01 5987.04,5218.01 ; 6193.41,5276.19 cw(c6259.43,5273.45) J3.27@6214.69,5322.08 ; 6211.19,5258.41 ccw(c6208.45,5324.43) J3.27@6257.08,5279.69 ; 6332.48,5311.31 cw(c6373.9,5302.99) R1.1@6356.91,5341.68 ; R1.1@6334.75,5322.62 cw(c6368.23,5315.9) R1.1@6354.5,5347.17 ; 6339.51,5312.93 ccw(c6331.69,5342.09) R1.1@6361.62,5338.14 ; R1.1@6348.18,5315.26 ccw(c6341.33,5340.82) R1.1@6367.57,5337.36 ; R1.1 6323.62,5300 ; 5987.04,5218.01 cw(c5987.04,5230.84) 5974.99,5226.46 ccw(c5987.04,5230.84) 5987.04,5218.01 ; 5987.04,5218.01 6002.43,5202.62 6002.43,5187.12 6057.66,5131.89 6131.89,5131.89 6181,5181 6181,5246 ; 6181,5246 cw(c6215.24,5211.76) 6225.82,5259.01 ccw(c6215.24,5211.76) 6181,5246 ; 6181,5246 ccw(c6146.76,5280.24) 6194.01,5290.82 cw(c6146.76,5280.24) 6181,5246 ; 6181,5246 J3.27 6323.62,5300 ; 6188.72,5253.72 cw(c6218.06,5224.37) 6227.13,5264.87 ccw(c6218.06,5224.37) 6188.72,5253.72 ; 6188.72,5253.72 ccw(c6159.37,5283.06) 6199.87,5292.13 cw(c6159.37,5283.06) 6188.72,5253.72 ; 6196.43,5261.43 cw(c6220.89,5236.97) 6228.45,5270.72 ccw(c6220.89,5236.97) 6196.43,5261.43 ; 6196.43,5261.43 ccw(c6171.97,5285.89) 6205.72,5293.45 cw(c6171.97,5285.89) 6196.43,5261.43 ; 6285.64,5300 cw(c6285.64,5341.42) 6253.58,5315.2 ccw(c6285.64,5341.42) 6285.64,5300 ; 6285.64,5300 ccw(c6285.64,5258.58) 6253.58,5284.8 cw(c6285.64,5258.58) 6285.64,5300 ; 6298.3,5300 cw(c6298.3,5351.78) 6258.22,5318.99 ccw(c6298.3,5351.78) 6298.3,5300 ; 6298.3,5300 ccw(c6298.3,5248.22) 6258.22,5281.01 cw(c6298.3,5248.22) 6298.3,5300 ; 6310.96,5300 cw(c6310.96,5362.13) 6262.87,5322.79 ccw(c6310.96,5362.13) 6310.96,5300 ; 6310.96,5300 ccw(c6310.96,5237.87) 6262.87,5277.21 cw(c6310.96,5237.87) 6310.96,5300 ; 6323.62,5300 ccw(c6289.43,5334.19) 6337.69,5337.27 cw(c6289.43,5334.19) 6323.62,5300 ; 6323.62,5300 cw(c6323.62,5372.49) 6267.51,5326.59 ccw(c6323.62,5372.49) 6323.62,5300 ; 6323.62,5300 ccw(c6323.62,5227.51) 6267.51,5273.41 cw(c6323.62,5227.51) 6323.62,5300 ; U4.3@5969.35,5224.41 ccw(c5978.48,5227.73) 5978.48,5218.01 cw(c5978.48,5227.73) U4.3@5969.35,5224.41 ; 6329.78,5306.16 cw(c6358.27,5277.68) 6358.27,5317.96 ccw(c6358.27,5277.68) 6329.78,5306.16 ; 6333.01,5309.39 ccw(c6307.08,5335.32) 6343.68,5337.65 cw(c6307.08,5335.32) 6333.01,5309.39 ; R1.1@6340.03,5316.41 cw(c6358.27,5298.16) 6358.27,5323.96 ccw(c6358.27,5298.16) R1.1@6340.03,5316.41 ; R1.1@6342.39,5318.77 ccw(c6324.72,5336.44) 6349.66,5338.03 cw(c6324.72,5336.44) R1.1@6342.39,5318.77
  Top Layer w10: U4.3 U4.3@5968.31,5224.41
SDA: J3.26 R2.1 U4.4 | length 2186.8
  Top Layer w6: U4.4 5913.31,5224.41 5931.71,5206.01 5982.07,5206.01 5987.35,5200.74 5987.35,5185.23 6052.69,5119.89 6152.06,5119.89 6232.17,5200 J3.26 6361.42,5200 R2.1 ; 5893.32,5224.41 cw(c5893.32,5245.68) 5878.28,5230.64 ccw(c5893.32,5245.68) 5893.32,5224.41 ; 5893.32,5224.41 ccw(c5893.32,5203.14) 5878.28,5218.18 cw(c5893.32,5203.14) 5893.32,5224.41 ; 6292.94,5200 cw(c6292.94,5257.94) 6251.97,5216.97 ccw(c6292.94,5257.94) 6292.94,5200 ; 6292.94,5200 ccw(c6292.94,5142.06) 6251.97,5183.03 cw(c6292.94,5142.06) 6292.94,5200 ; 6307.43,5200 cw(c6307.43,5272.43) 6256.21,5221.21 ccw(c6307.43,5272.43) 6307.43,5200 ; 6307.43,5200 ccw(c6307.43,5127.57) 6256.21,5178.79 cw(c6307.43,5127.57) 6307.43,5200 ; 6321.91,5200 cw(c6321.91,5286.91) 6260.46,5225.46 ccw(c6321.91,5286.91) 6321.91,5200 ; 6321.91,5200 ccw(c6321.91,5113.09) 6260.46,5174.54 cw(c6321.91,5113.09) 6321.91,5200 ; 6323.52,5198.74 cw(c6325.26,5180.93) R2.1@6340.6,5190.16 ; 6323.52,5198.74 ccw(c6321.53,5219.04) R2.1@6339.8,5209.96 ; 6323.52,5198.74 cw(c6325.26,5180.93) R2.1@6340.6,5190.16 ; 6323.52,5198.74 ccw(c6321.53,5219.04) R2.1@6339.8,5209.96 ; 6323.52,5198.74 cw(c6325.26,5180.93) R2.1@6340.6,5190.16 ; 6323.52,5198.74 ccw(c6321.53,5219.04) R2.1@6339.8,5209.96 ; 6331.42,5200.49 cw(c6330.6,5192.17) R2.1@6338.58,5194.66 ; 6331.41,5200.49 ccw(c6332.03,5206.74) R2.1@6338.16,5205.35 ; 6331.42,5200.49 cw(c6330.6,5192.17) R2.1@6338.58,5194.66 ; 6331.41,5200.49 ccw(c6332.03,5206.74) R2.1@6338.16,5205.35 ; 6331.42,5200.49 cw(c6330.6,5192.17) R2.1@6338.58,5194.66 ; 6331.41,5200.49 ccw(c6332.03,5206.74) R2.1@6338.16,5205.35 ; 6332.98,5199.67 cw(c6334.28,5186.35) R2.1@6345.74,5193.25 ; 6332.98,5199.67 cw(c6334.28,5186.35) R2.1@6345.74,5193.25 ; 6332.98,5199.67 cw(c6334.28,5186.35) R2.1@6345.74,5193.25 ; 6334.3,5199.79 ccw(c6332.97,5213.36) R2.1@6345.17,5207.29 ; 6334.3,5199.79 ccw(c6332.97,5213.36) R2.1@6345.17,5207.29 ; 6334.3,5199.79 ccw(c6332.97,5213.36) R2.1@6345.17,5207.29 ; R2.1@6336.4,5200 cw(c6336.4,5301.4) 6264.7,5229.7 ccw(c6336.4,5301.4) R2.1@6336.4,5200 ; R2.1@6336.4,5200 ccw(c6336.4,5098.6) 6264.7,5170.3 cw(c6336.4,5098.6) R2.1@6336.4,5200 ; 6306.58,5200 ccw(c6306.58,5252.47) 6343.69,5215.37 cw(c6306.58,5252.47) 6306.58,5200 ; 6310.38,5200 cw(c6310.38,5152.9) 6343.69,5186.21 ccw(c6310.38,5152.9) 6310.38,5200 ; 6321.07,5200 ccw(c6321.07,5237.99) 6347.93,5211.13 cw(c6321.07,5237.99) 6321.07,5200 ; 6324.87,5200 cw(c6324.87,5167.39) 6347.93,5190.45 ccw(c6324.87,5167.39) 6324.87,5200
SWO: C1.1 C2.1 C34.1 C35.1 C37.1 L2.2 R22.1 R26.2 U4.1 U4.5 | length 1814.5
  Top Layer w10: R26.2 5732.09,5076.77 5772.46,5036.4 5772.46,4954.11 5779.72,4946.85 6013.78,4946.85 6017.72,4942.91 ; C37.1 5832.68,5187.01 U4.5 5873.82,5187.01 5894.86,5165.97 5894.86,5126.8 5936.2,5085.46 5936.2,4970.47 5944.07,4962.6 5956.69,4962.6 ; C37.1@5797.61,5227.71 cw(c5788.16,5193.81) 5822.15,5202.91 ; U4.1 5956.69,5106.3 5969.85,5093.14 ; R22.1 6054.13,5076.77 6037.76,5093.14 5969.85,5093.14 ; 5835.92,5187.01 cw(c5835.92,5170.56) 5847.55,5182.19 ccw(c5835.92,5170.56) 5835.92,5187.01 ; 5835.92,5187.01 ccw(c5835.92,5203.45) 5847.55,5191.82 cw(c5835.92,5203.45) 5835.92,5187.01 ; 5956.69,5133.16 cw(c5973.14,5133.16) 5961.51,5144.79 ccw(c5973.14,5133.16) 5956.69,5133.16 ; 5956.69,5133.16 ccw(c5940.25,5133.16) 5951.88,5144.79 cw(c5940.25,5133.16) 5956.69,5133.16 ; 5969.85,5093.14 cw(c5969.85,5016.26) 6034.38,5058.06 ccw(c5969.85,5016.26) 5969.85,5093.14 ; C37.1@5797.24,5207.76 cw(c5797.24,5172.3) 5822.31,5197.37 ccw(c5797.24,5172.3) C37.1@5797.24,5207.76 ; C37.1@5805.87,5226.38 ccw(c5836.19,5226.38) 5814.75,5204.94 cw(c5836.19,5226.38) C37.1@5805.87,5226.38 ; C37.1@5815.87,5226.38 ccw(c5870.33,5226.38) 5831.82,5187.87 cw(c5870.33,5226.38) C37.1@5815.87,5226.38 ; U4.5@5872.05,5180.2 cw(c5872.05,5159.46) 5886.71,5174.12 ccw(c5872.05,5159.46) U4.5@5872.05,5180.2 ; U4.5@5878.86,5187.01 ccw(c5891.01,5187.01) 5882.42,5178.41 cw(c5891.01,5187.01) U4.5@5878.86,5187.01 ; 5988.25,5093.14 cw(c5988.25,5028.18) 6042.77,5063.5 ccw(c5988.25,5028.18) 5988.25,5093.14 ; 6006.64,5093.14 cw(c6006.64,5040.1) 6051.16,5068.94 ccw(c6006.64,5040.1) 6006.64,5093.14 ; 6025.04,5093.14 cw(c6025.04,5052.01) 6059.55,5074.38 ccw(c6025.04,5052.01) 6025.04,5093.14
  other v1: 5352.36,4799.21 5368.11,4799.21 5383.86,4799.21 5399.61,4799.21 5415.35,4799.21 5431.1,4799.21 5446.85,4799.21 5462.6,4799.21
VIN: C31.1 C39.1 J3.5 R28.2 U8.2 | length 1933
  Top Layer w6: J3.5@5587.92,5604.69 ccw(c5636.55,5649.43) 5633.81,5583.41 ; J3.5 5664,5571 ; J3.5@5630.31,5647.08 cw(c5585.57,5598.45) 5651.59,5601.19 ; 5847.73,5538.87 ccw(c5880.64,5547.69) R28.2@5873.29,5514.42 ; 5850.28,5529.33 ccw(c5878.23,5536.82) R28.2@5871.99,5508.56 ; 5853.77,5543.76 cw(c5845.34,5512.32) R28.2@5877.34,5518.34 ; R28.2@5862.98,5541.3 cw(c5855.74,5514.27) R28.2@5883.23,5519.45 ; R28.2 5874.02,5518.63 5821.65,5571 5664,5571 ; 5648.57,5586.43 cw(c5673.03,5610.89) 5639.28,5618.45 ccw(c5673.03,5610.89) 5648.57,5586.43 ; 5648.57,5586.43 ccw(c5624.11,5561.97) 5616.55,5595.72 cw(c5624.11,5561.97) 5648.57,5586.43 ; 5656.28,5578.72 cw(c5685.63,5608.06) 5645.13,5617.13 ccw(c5685.63,5608.06) 5656.28,5578.72 ; 5656.28,5578.72 ccw(c5626.94,5549.37) 5617.87,5589.87 cw(c5626.94,5549.37) 5656.28,5578.72 ; 5664,5571 cw(c5698.24,5605.24) 5650.99,5615.82 ccw(c5698.24,5605.24) 5664,5571 ; 5664,5571 ccw(c5629.76,5536.76) 5619.18,5584.01 cw(c5629.76,5536.76) 5664,5571 ; 5838.16,5554.49 cw(c5801.39,5517.72) 5853.39,5517.72 ccw(c5801.39,5517.72) 5838.16,5554.49 ; 5840.38,5552.27 ccw(c5874.02,5585.91) 5874.02,5538.34 cw(c5874.02,5585.91) 5840.38,5552.27 ; 5848.41,5544.24 cw(c5821.88,5517.72) 5859.39,5517.72 ccw(c5821.88,5517.72) 5848.41,5544.24 ; 5850.62,5542.03 ccw(c5874.02,5565.42) 5874.02,5532.34 cw(c5874.02,5565.42) 5850.62,5542.03
  Top Layer w50: C31.1 5342.52,5407.48 5342.52,5553.15 5414.37,5625 J3.5 ; 5561.72,5625 cw(c5561.72,5576.72) 5595.86,5610.86 ccw(c5561.72,5576.72) 5561.72,5625 ; 5561.72,5625 ccw(c5561.72,5673.28) 5595.86,5639.14 cw(c5561.72,5673.28) 5561.72,5625
pads on no net: J3.4 J3.8 J3.9 J3.10 J3.11 J3.12 J3.13 J3.14 J3.15 J3.16 J3.17 J3.18 J3.19 J3.20 J3.21 J3.22 J3.23 J3.24 J3.25 J3.28 U3.3 U3.4

## Polygon pours and split planes (outlines as drawn)
GND on Bottom Layer "Keep-Out Layer-No Net" (solid, remove dead copper, pour order 5): 5087.41,5743.17 5087.41,4503.01 6284.26,4503.01 6313.79,4503.01 6313.79,5093.56 6313.79,5095.53 6351.19,5095.53 6357.09,5095.53 6357.09,5142.78 6837.41,5142.78 6841.34,5142.78 6841.34,5745.14 6841.34,5747.11 5091.34,5747.11

## Keep-outs
Keep-Out Layer:
  lines w10: 5305,5720 6786.24,5720 ; 6316.28,4695 6316.28,5084.51 cw(c6366.28,5084.51) 6366.28,5134.51 ; 6366.28,5134.72 6786.24,5134.72 ccw(c6786.24,5184.72) 6836.24,5184.72 6836.24,5669.72 ccw(c6786.24,5669.72) 6786.24,5719.72 ; 5261.81,4818.9 5261.81,5110.24 5547.24,5110.24 5547.24,4818.9 5261.81,4818.9

## Other copper
Top Layer:
  rectangle net SWO: 5950.79,4956.69 6090.55,5080.71
  rectangle net GND: 5425.2,5533.46 5568.9,5590.55
  rectangle net GND: 5425.2,5474.41 5647.64,5570.87
  rectangle net GND: 5596.46,4795.28 5683.07,5557.09
  rectangle net GND: 5596.51,4795.28 6000,4935.04
  rectangle net GND: 5596.46,4927.17 5753.94,5039.37
  rectangle net GND: 5318.9,5200.79 5677.17,5314.96
  rectangle net GND: 5486.22,5468.5 5762.44,5561.02
  rectangle net VIN: 5318.9,5372.05 5586.61,5427.17
  rectangle net SWO: 6007.87,4716.54 6175.2,5080.71
  rectangle net 5V: 5783.46,4958.66 5925.2,5080.71
  rectangle net 5SW: 5301.18,5322.83 5586.61,5364.17
  rectangle net 5SW: 5236.22,5110.24 5311.02,5364.17
  rectangle net 5SW: 5236.22,5110.24 5549.21,5192.91
  rectangle net SWO: 5368.11,4629.92 6179.13,4781.5
  rectangle net SWO: 5307.09,4630.08 5547.24,4818.9
  rectangle net VIN: 5354.33,5421.26 5417.32,5596.46
  rectangle net 5V: 6023.62,5198.82 6141.73,5259.84
  rectangle net 5V: 6035.43,5188.98 6141.73,5200.79
  rectangle net GND: 5562.99,4795.28 5635.83,5222.44
  text "MAGI" at 5155.91,4690.16 h39.37
  text "Buck" at 5155.12,4637.01 h40
Bottom Layer:
  rectangle net 5V: 5820.87,4952.76 5940.94,5098.43
  rectangle net 5V: 5820.87,4950.79 6175.2,5098.43
  rectangle net 5V: 5968.5,4950.79 6181.1,5511.81
  rectangle net 5V: 6153.54,5517.72 6188.98,5549.21
  rectangle net GND: 5811.02,4781.5 5958.66,4942.91
  rectangle net GND: 5584.65,4763.78 5812.99,4970.47
  rectangle net GND: 5309.06,5185.04 5618.11,5253.94
  rectangle net GND: 5679.13,4935.04 5765.75,5066.22
  rectangle net GND: 5761.81,5090.66 5814.37,5147.64
  rectangle net GND: 5911.42,5252.5 5962.01,5320.87
  rectangle net GND: 5883.86,5159.45 5938.98,5212.6
  rectangle net GND: 5582.68,5289.37 5692.91,5444.88
  rectangle net GND: 5466.54,5470.47 5710.63,5572.83
  rectangle net GND: 5964.57,5566.93 6084.65,5627.95
  rectangle net GND: 6431.1,5523.62 6470.47,5614.17
  rectangle net GND: 6011.81,5622.05 6090.55,5669.29

## Silkscreen, mask and mechanical layers (free items; w line width, h text height)
Top Solder:
  rectangle: 5344.49,5478.27 5409.69,5590.55
  rectangle: 5425.2,5478.27 5490.39,5590.55
  region: 6070.87,5153.54 6047.24,5177.17 6047.24,5263.78 6070.87,5287.4 6094.49,5287.4 6118.11,5263.78 6118.11,5177.17 6094.49,5153.54
Bottom Solder:
  rectangle: 5595,5280 5680,5460

## Text inside footprints (layer, text, board x,y; h text height)
J3: Bottom Overlay "5V" at 5834.57,5514.84 h31.5; Bottom Overlay "3V3" at 5944.57,5514.84 h31.5; Bottom Overlay "GND" at 6049.57,5514.84 h31.5; Bottom Overlay "RST" at 6168.98,5375.08 h39.37; Bottom Overlay "A5" at 6168.98,5274.25 h39.37; Bottom Overlay "A4" at 6168.98,5173.41 h39.37; Bottom Overlay "A3" at 6168.98,5072.58 h39.37; Bottom Overlay "A2" at 6168.98,4971.75 h39.37; Bottom Overlay "A1" at 6168.98,4870.91 h39.37; Bottom Overlay "A0" at 6168.98,4770.08 h39.37; Bottom Overlay "D13" at 6048.98,4637.95 h31.5; Bottom Overlay "D12" at 5949.98,4637.95 h31.5; Bottom Overlay "D11" at 5840.48,4637.95 h31.5; Bottom Overlay "D10" at 5751.97,4637.95 h31.5; Bottom Overlay "D9" at 5641.98,4640.08 h39.37; Bottom Overlay "D8" at 5542.98,4640.08 h39.37; Bottom Overlay "D7" at 5443.98,4640.08 h39.37; Bottom Overlay "D6" at 5318.98,4775.08 h39.37; Bottom Overlay "D5" at 5318.98,4875.08 h39.37; Bottom Overlay "D4" at 5318.98,4975.08 h39.37; Bottom Overlay "D3" at 5318.98,5075.08 h39.37; Bottom Overlay "D2" at 5318.98,5175.08 h39.37; Bottom Overlay "D1" at 5318.98,5275.08 h39.37; Bottom Overlay "D0" at 5318.98,5375.08 h39.37; Bottom Layer "MAGI" at 6230,4580 h31.5